# EAGLE board multiple_print_asomator_smd (EAGLE 7.7.0)
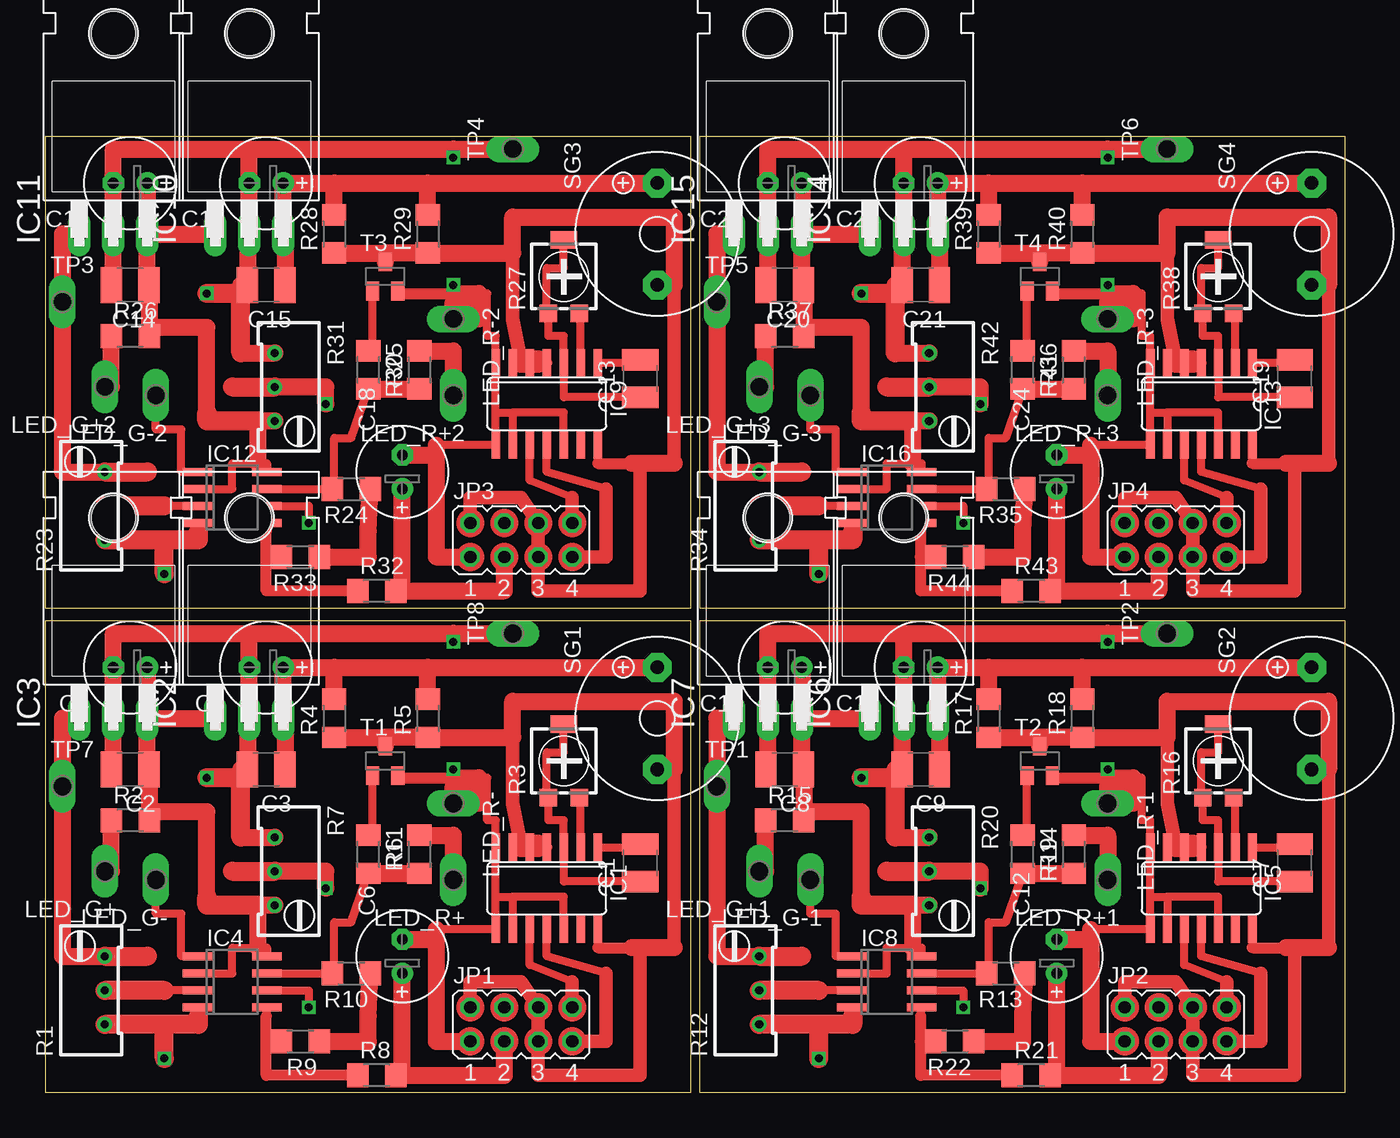
[diagram p0: board, top side]
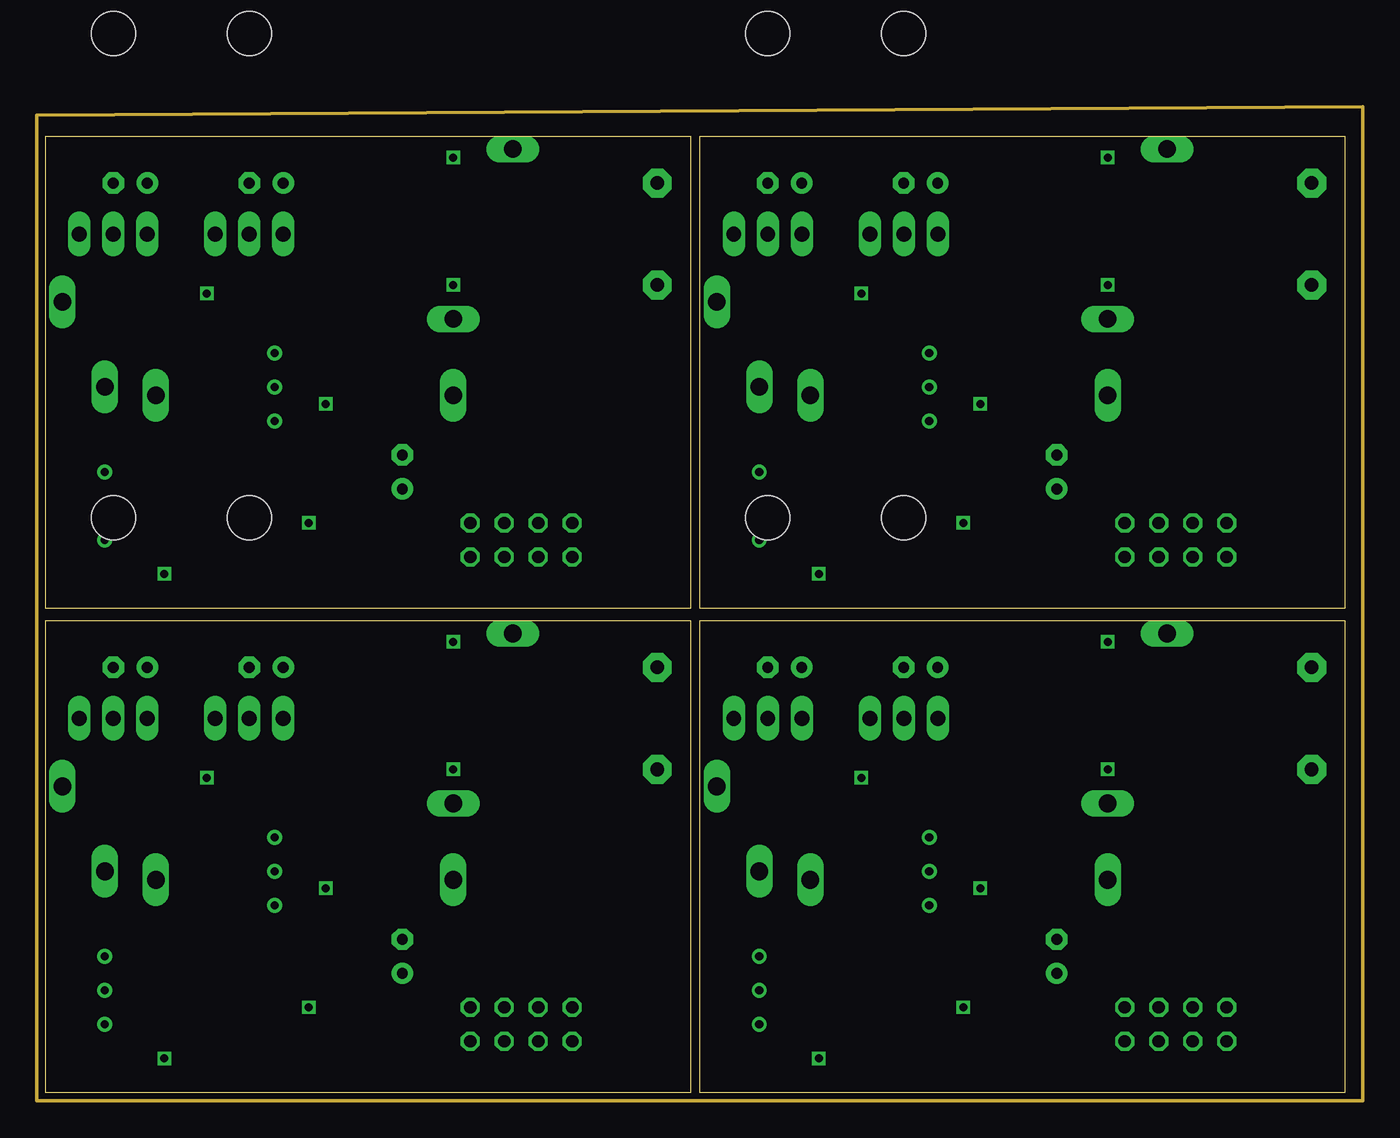
[diagram p1: board, inner layer Route2]
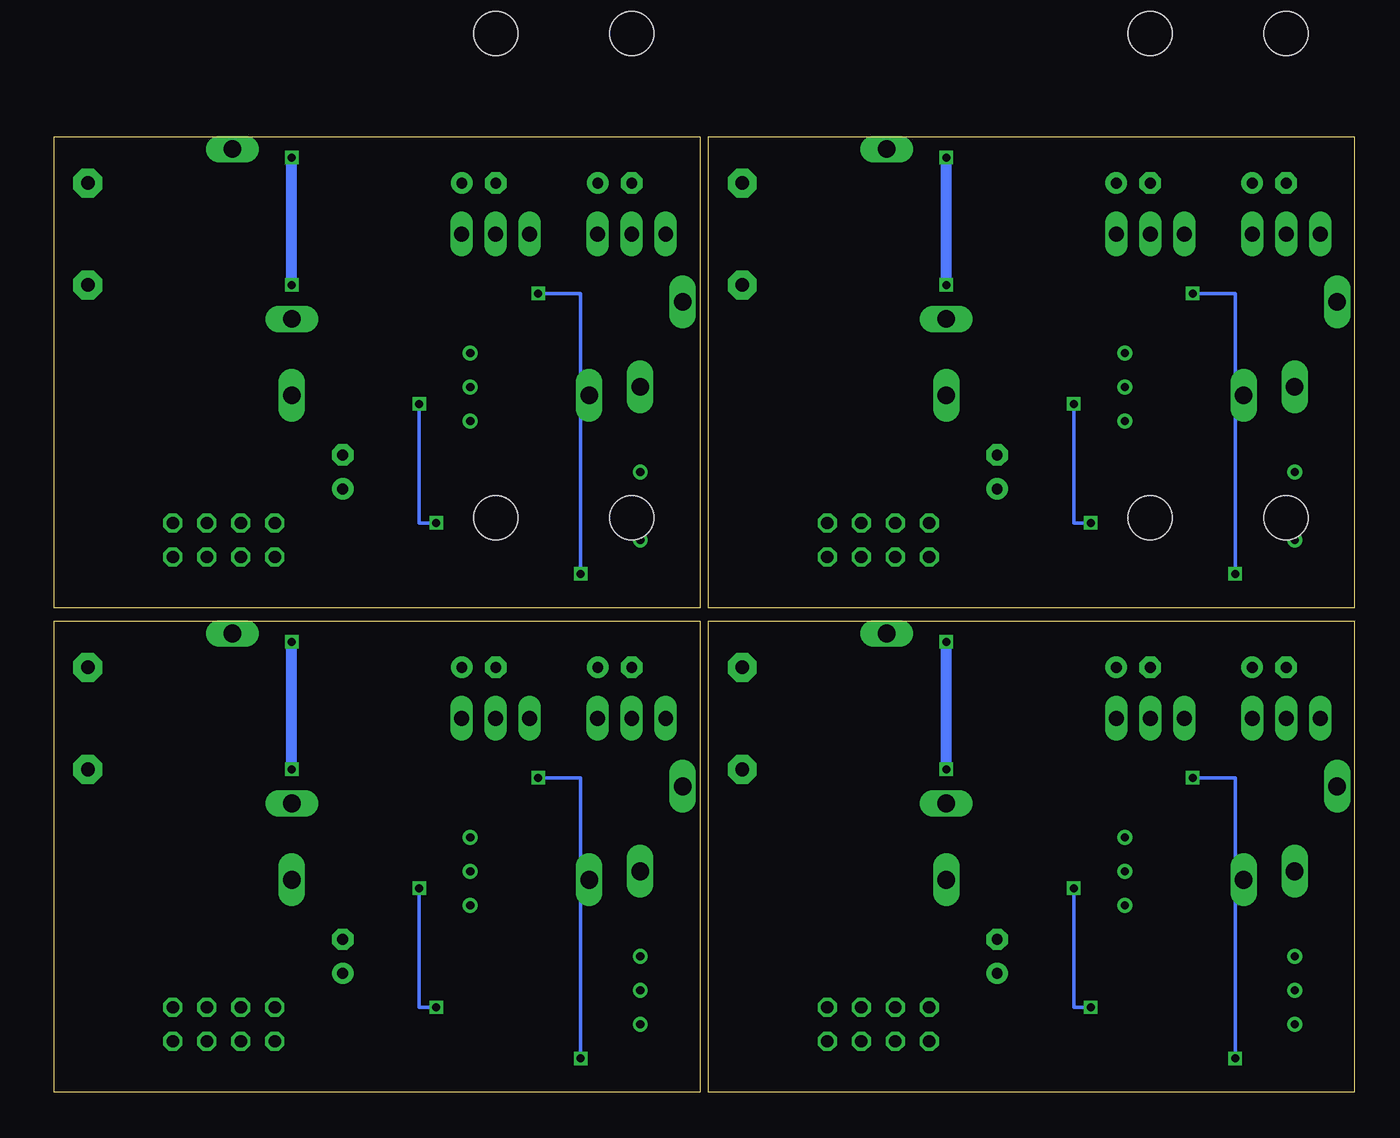
[diagram p2: board, bottom side, seen from below]

Size 97.13 x 71.42 mm. Coordinates in mm from the lower left corner, seen from the top.
Outline: 0,0 48.24,0 48.24,35.23 0,35.23 0,0
Outline: 48.9,0 97.13,0 97.13,35.23 48.9,35.23 48.9,0
Outline: 0,36.2 48.24,36.2 48.24,71.42 0,71.42 0,36.2
Outline: 48.9,36.2 97.13,36.2 97.13,71.42 48.9,71.42 48.9,36.2
Copper layers (1*2*16): Top 0.035mm / dielectric 1.5mm / Route2 0.035mm / dielectric 0.15mm / Bottom 0.035mm
Design rules "default *": minimum track width 10mil, minimum drill 24mil, track to track 8mil, track to pad 8mil, pad to pad 8mil, via to via 8mil, smd to smd 8mil, copper to edge 40mil, drill to drill 8mil, minimum pad ring 10mil, minimum via ring 8mil, stop-mask expansion 4mil, vias tented up to drill 0mil, thermal gap 10mil

## Footprints (pad centres in the part's own frame; a part is rotated, then mirrored left to right if it is on the bottom)
C1210 = smd 1.6 x 2.7: 1 -1.4,0; 2 1.4,0
E2,5-7 = drill 0.813 pad 1.6: + -1.27,0 | drill 0.813 pad 1.6 octagon: - 1.27,0
SO14 = smd 0.66 x 2.032: 1 -3.81,-3.073; 2 -2.54,-3.073; 3 -1.27,-3.073; 4 0,-3.073; 5 1.27,-3.073; 6 2.54,-3.073; 7 3.81,-3.073; 8 3.81,3.073; 9 2.54,3.073; 10 1.27,3.073; 11 0,3.073; 12 -1.27,3.073; 13 -2.54,3.073; 14 -3.81,3.073
TO220H = drill 1.118 long: 1 -2.54,-10.16; 2 0,-10.16; 3 2.54,-10.16 | hole 3.302: 0,4.826
SO08 = smd 0.6 x 2.2: 1 -1.905,-2.6; 2 -0.635,-2.6; 3 0.635,-2.6; 4 1.905,-2.6; 5 1.905,2.6; 6 0.635,2.6; 7 -0.635,2.6; 8 -1.905,2.6
JP4Q = drill 0.914 octagon: 1 -3.81,-1.27; 2 -3.81,1.27; 3 -1.27,-1.27; 4 -1.27,1.27; 5 1.27,-1.27; 6 1.27,1.27; 7 3.81,-1.27; 8 3.81,1.27
P1-13Y = drill 1.321 pad 1.905 long: TP 0,0
RTRIM64W = drill 0.61: 1 1.27,-2.54; 2 1.27,0; 3 1.27,2.54
R1206 = smd 1.6 x 1.803: 1 -1.422,0; 2 1.422,0
RTRIM4G/J = smd 1.3 x 1.3: 1 -1.15,-2.75; 3 1.15,-2.75 | smd 2 x 1.3: 2 0,2.75
F/TMB = drill 1.016 pad 2.159 octagon: + 3.81,0; - -3.81,0
SOT23 = smd 1 x 1.4: 1 -0.95,-1.1; 2 0.95,-1.1; 3 0,1.1

## Placement (x,y rotation side)
C1  [C1210]  44.45,17.14 90 top
C2  [C1210]  6.35,24.13 180 top
C3  [C1210]  16.51,24.13 180 top
C4  [E2,5-7]  6.35,31.75 180 top
C5  [E2,5-7]  16.51,31.75 180 top
C6  [E2,5-7]  26.67,10.16 90 top
C7  [C1210]  93.34,17.14 90 top
C8  [C1210]  55.25,24.13 180 top
C9  [C1210]  65.41,24.13 180 top
C10  [E2,5-7]  55.25,31.75 180 top
C11  [E2,5-7]  65.41,31.75 180 top
C12  [E2,5-7]  75.56,10.16 90 top
C13  [C1210]  44.45,53.34 90 top
C14  [C1210]  6.35,60.33 180 top
C15  [C1210]  16.51,60.33 180 top
C16  [E2,5-7]  6.35,67.94 180 top
C17  [E2,5-7]  16.51,67.94 180 top
C18  [E2,5-7]  26.67,46.36 90 top
C19  [C1210]  93.34,53.34 90 top
C20  [C1210]  55.25,60.33 180 top
C21  [C1210]  65.41,60.33 180 top
C22  [E2,5-7]  55.25,67.94 180 top
C23  [E2,5-7]  65.41,67.94 180 top
C24  [E2,5-7]  75.56,46.36 90 top
IC1  4047D  [SO14]  37.47,15.24 180 top
IC2  78T  [TO220H]  15.24,38.1 0 top
IC3  78T  [TO220H]  5.08,38.1 0 top
IC4  LM358D  [SO08]  13.97,8.26 270 top
IC5  4047D  [SO14]  86.36,15.24 180 top
IC6  78T  [TO220H]  64.13,38.1 0 top
IC7  78T  [TO220H]  53.98,38.1 0 top
IC8  LM358D  [SO08]  62.87,8.26 270 top
IC9  4047D  [SO14]  37.47,51.44 180 top
IC10  78T  [TO220H]  15.24,74.3 0 top
IC11  78T  [TO220H]  5.08,74.3 0 top
IC12  LM358D  [SO08]  13.97,44.45 270 top
IC13  4047D  [SO14]  86.36,51.44 180 top
IC14  78T  [TO220H]  64.13,74.3 0 top
IC15  78T  [TO220H]  53.98,74.3 0 top
IC16  LM358D  [SO08]  62.87,44.45 270 top
JP1  [JP4Q]  35.56,5.08 0 top
JP2  [JP4Q]  84.45,5.08 0 top
JP3  [JP4Q]  35.56,41.27 0 top
JP4  [JP4Q]  84.45,41.27 0 top
LED_G+  PTR1PAD1-13Y  [P1-13Y]  4.45,16.51 180 top
LED_G+1  PTR1PAD1-13Y  [P1-13Y]  53.34,16.51 180 top
LED_G+2  PTR1PAD1-13Y  [P1-13Y]  4.45,52.71 180 top
LED_G+3  PTR1PAD1-13Y  [P1-13Y]  53.34,52.71 180 top
LED_G-  PTR1PAD1-13Y  [P1-13Y]  8.26,15.88 180 top
LED_G-1  PTR1PAD1-13Y  [P1-13Y]  57.15,15.88 180 top
LED_G-2  PTR1PAD1-13Y  [P1-13Y]  8.26,52.07 180 top
LED_G-3  PTR1PAD1-13Y  [P1-13Y]  57.15,52.07 180 top
LED_R+  PTR1PAD1-13Y  [P1-13Y]  30.48,15.88 180 top
LED_R+1  PTR1PAD1-13Y  [P1-13Y]  79.38,15.88 180 top
LED_R+2  PTR1PAD1-13Y  [P1-13Y]  30.48,52.07 180 top
LED_R+3  PTR1PAD1-13Y  [P1-13Y]  79.38,52.07 180 top
LED_R-  PTR1PAD1-13Y  [P1-13Y]  30.48,21.59 270 top
LED_R-1  PTR1PAD1-13Y  [P1-13Y]  79.38,21.59 270 top
LED_R-2  PTR1PAD1-13Y  [P1-13Y]  30.48,57.79 270 top
LED_R-3  PTR1PAD1-13Y  [P1-13Y]  79.38,57.79 270 top
R1  50k  [RTRIM64W]  3.17,7.62 0 top
R2  1k  [R1206]  6.35,20.32 0 top
R3  [RTRIM4G/J]  38.73,24.76 0 top
R4  1k  [R1206]  21.59,27.94 90 top
R5  1k  [R1206]  28.57,27.94 90 top
R6  10k  [R1206]  24.13,17.78 270 top
R7  50k  [RTRIM64W]  18.41,16.51 180 top
R8  20k  [R1206]  24.76,1.27 0 top
R9  10k  [R1206]  19.05,3.81 180 top
R10  10k  [R1206]  22.86,8.89 180 top
R11  1k  [R1206]  27.94,17.78 90 top
R12  50k  [RTRIM64W]  52.07,7.62 0 top
R13  10k  [R1206]  71.75,8.89 180 top
R14  1k  [R1206]  76.83,17.78 90 top
R15  1k  [R1206]  55.25,20.32 0 top
R16  [RTRIM4G/J]  87.63,24.76 0 top
R17  1k  [R1206]  70.48,27.94 90 top
R18  1k  [R1206]  77.47,27.94 90 top
R19  10k  [R1206]  73.02,17.78 270 top
R20  50k  [RTRIM64W]  67.31,16.51 180 top
R21  20k  [R1206]  73.66,1.27 0 top
R22  10k  [R1206]  67.94,3.81 180 top
R23  50k  [RTRIM64W]  3.17,43.82 0 top
R24  10k  [R1206]  22.86,45.09 180 top
R25  1k  [R1206]  27.94,53.98 90 top
R26  1k  [R1206]  6.35,56.52 0 top
R27  [RTRIM4G/J]  38.73,60.96 0 top
R28  1k  [R1206]  21.59,64.13 90 top
R29  1k  [R1206]  28.57,64.13 90 top
R30  10k  [R1206]  24.13,53.98 270 top
R31  50k  [RTRIM64W]  18.41,52.71 180 top
R32  20k  [R1206]  24.76,37.47 0 top
R33  10k  [R1206]  19.05,40.01 180 top
R34  50k  [RTRIM64W]  52.07,43.82 0 top
R35  10k  [R1206]  71.75,45.09 180 top
R36  1k  [R1206]  76.83,53.98 90 top
R37  1k  [R1206]  55.25,56.52 0 top
R38  [RTRIM4G/J]  87.63,60.96 0 top
R39  1k  [R1206]  70.48,64.13 90 top
R40  1k  [R1206]  77.47,64.13 90 top
R41  10k  [R1206]  73.02,53.98 270 top
R42  50k  [RTRIM64W]  67.31,52.71 180 top
R43  20k  [R1206]  73.66,37.47 0 top
R44  10k  [R1206]  67.94,40.01 180 top
SG1  F/TMB  [F/TMB]  45.72,27.94 90 top
SG2  F/TMB  [F/TMB]  94.61,27.94 90 top
SG3  F/TMB  [F/TMB]  45.72,64.13 90 top
SG4  F/TMB  [F/TMB]  94.61,64.13 90 top
T1  BC847  [SOT23]  25.4,24.76 0 top
T2  BC847  [SOT23]  74.3,24.76 0 top
T3  BC847  [SOT23]  25.4,60.96 0 top
T4  BC847  [SOT23]  74.3,60.96 0 top
TP1  PTR1PAD1-13Y  [P1-13Y]  50.16,22.86 0 top
TP2  PTR1PAD1-13Y  [P1-13Y]  83.82,34.29 90 top
TP3  PTR1PAD1-13Y  [P1-13Y]  1.27,59.05 0 top
TP4  PTR1PAD1-13Y  [P1-13Y]  34.93,70.48 90 top
TP5  PTR1PAD1-13Y  [P1-13Y]  50.16,59.05 0 top
TP6  PTR1PAD1-13Y  [P1-13Y]  83.82,70.48 90 top
TP7  PTR1PAD1-13Y  [P1-13Y]  1.27,22.86 0 top
TP8  PTR1PAD1-13Y  [P1-13Y]  34.93,34.29 90 top

## Library data of the parts
C1-C24 R1-R44 = rcl
IC1 IC5 IC9 IC13 = 40xx
IC2-IC4 IC6-IC8 IC10-IC12 IC14-IC16 = linear
JP1-JP4 = jumper
LED_G+ LED_G+1-LED_G+3 LED_G- LED_G-1-LED_G-3 LED_R+ LED_R+1-LED_R+3 LED_R- LED_R-1-LED_R-3 TP1-TP8 = testpad
SG1-SG4 = buzzer; OC_FARNELL: unknown; OC_NEWARK: unknown
T1-T4 = transistor

## Nets
+5V: IC1.4 IC1.5 IC1.6 IC1.14 JP1.2 JP1.5 JP1.6 R4.1 R5.1 SG1.- T1.3
+5V1: IC5.4 IC5.5 IC5.6 IC5.14 JP2.2 JP2.5 JP2.6 R17.1 R18.1 SG2.- T2.3
+5V2: IC9.4 IC9.5 IC9.6 IC9.14 JP3.2 JP3.5 JP3.6 R28.1 R29.1 SG3.- T3.3
+5V3: IC13.4 IC13.5 IC13.6 IC13.14 JP4.2 JP4.5 JP4.6 R39.1 R40.1 SG4.- T4.3
+12V: C2.1 C4.+ IC2.1 IC3.3 IC4.2 IC4.8 R2.2 R7.3
+12V1: C8.1 C10.+ IC6.1 IC7.3 IC8.2 IC8.8 R15.2 R20.3
+12V2: C14.1 C16.+ IC10.1 IC11.3 IC12.2 IC12.8 R26.2 R31.3
+12V3: C20.1 C22.+ IC14.1 IC15.3 IC16.2 IC16.8 R37.2 R42.3
+18V: IC3.1 R1.3 TP7.TP
+18V1: IC7.1 R12.3 TP1.TP
+18V2: IC11.1 R23.3 TP3.TP
+18V3: IC15.1 R34.3 TP5.TP
GND: C2.2 C3.2 C4.- C5.- C6.- IC1.7 IC1.8 IC1.9 IC1.12 IC2.2 IC3.2 IC4.4 JP1.1 LED_R-.TP R1.1 R7.1 T1.2 TP8.TP
GND1: C8.2 C9.2 C10.- C11.- C12.- IC5.7 IC5.8 IC5.9 IC5.12 IC6.2 IC7.2 IC8.4 JP2.1 LED_R-1.TP R12.1 R20.1 T2.2 TP2.TP
GND2: C14.2 C15.2 C16.- C17.- C18.- IC9.7 IC9.8 IC9.9 IC9.12 IC10.2 IC11.2 IC12.4 JP3.1 LED_R-2.TP R23.1 R31.1 T3.2 TP4.TP
GND3: C20.2 C21.2 C22.- C23.- C24.- IC13.7 IC13.8 IC13.9 IC13.12 IC14.2 IC15.2 IC16.4 JP4.1 LED_R-3.TP R34.1 R42.1 T4.2 TP6.TP
N$2: LED_G+.TP R2.1
N$3: LED_R+.TP R11.2
N$4: IC4.1 LED_G-.TP
N$5: IC4.3 R1.2
N$6: IC4.7 R6.2 R10.2 R11.1
N$7: IC1.2 R3.3
N$8: C1.2 IC1.1
N$9: C1.1 IC1.3 R3.1 R3.2
N$10: C3.1 C5.+ IC2.3 R4.2 R5.2 SG1.+
N$12: IC1.10 JP1.8
N$13: IC4.5 R8.1 R9.2
N$14: R9.1 R10.1
N$15: IC4.6 R7.2
N$16: IC1.11 JP1.7
N$17: C6.+ JP1.3 R8.2
N$18: R6.1 T1.1
N$19: IC5.2 R16.3
N$20: C7.2 IC5.1
N$21: C7.1 IC5.3 R16.1 R16.2
N$22: IC8.1 LED_G-1.TP
N$23: IC8.3 R12.2
N$24: C9.1 C11.+ IC6.3 R17.2 R18.2 SG2.+
N$25: IC8.6 R20.2
N$26: IC8.5 R21.1 R22.2
N$27: R13.1 R22.1
N$28: R19.1 T2.1
N$29: IC8.7 R13.2 R14.1 R19.2
N$30: IC5.10 JP2.8
N$31: IC5.11 JP2.7
N$32: C12.+ JP2.3 R21.2
N$33: LED_G+1.TP R15.1
N$34: LED_R+1.TP R14.2
N$37: IC9.2 R27.3
N$38: C13.2 IC9.1
N$39: C13.1 IC9.3 R27.1 R27.2
N$40: IC12.1 LED_G-2.TP
N$41: IC12.3 R23.2
N$42: C15.1 C17.+ IC10.3 R28.2 R29.2 SG3.+
N$43: IC12.6 R31.2
N$44: IC12.5 R32.1 R33.2
N$45: R24.1 R33.1
N$46: R30.1 T3.1
N$47: IC12.7 R24.2 R25.1 R30.2
N$48: IC9.10 JP3.8
N$49: IC9.11 JP3.7
N$50: C18.+ JP3.3 R32.2
N$51: LED_G+2.TP R26.1
N$52: LED_R+2.TP R25.2
N$55: IC13.2 R38.3
N$56: C19.2 IC13.1
N$57: C19.1 IC13.3 R38.1 R38.2
N$58: IC16.1 LED_G-3.TP
N$59: IC16.3 R34.2
N$60: C21.1 C23.+ IC14.3 R39.2 R40.2 SG4.+
N$61: IC16.6 R42.2
N$62: IC16.5 R43.1 R44.2
N$63: R35.1 R44.1
N$64: R41.1 T4.1
N$65: IC16.7 R35.2 R36.1 R41.2
N$66: IC13.10 JP4.8
N$67: IC13.11 JP4.7
N$68: C24.+ JP4.3 R43.2
N$69: LED_G+3.TP R37.1
N$70: LED_R+3.TP R36.2

## Tracks (layer width: path | path; a pad name or v marks a point on that pad's centre or on a via)
+5V
  Top 0.406: IC1.6 IC1.5 36.83,18.31
  Top 0.61: IC1.14 41.27,10.79
  Top 0.813: 41.27,10.79 43.82,10.79 44.45,10.79 | IC1.4 36.83,18.31 36.83,18.41
  Top 1.016: 44.45,10.79 44.45,1.27 36.83,1.27 JP1.5 JP1.6 35.56,8.26 31.75,8.26 JP1.2 | 46.99,24.13 46.99,10.79 | 35.56,18.41 34.93,21.59 34.93,29.21
  Top 1.27: SG1.- 46.99,24.13 46.99,29.21 34.93,29.21 34.93,26.52 R5.1 25.4,26.52 | 46.99,10.79 43.82,10.79 | R4.1 25.4,26.52 | 25.4,26.52 T1.3
  Top 1.676: 36.83,18.41 35.56,18.41
+5V1
  Top 0.406: IC5.6 IC5.5 85.72,18.31
  Top 0.61: IC5.14 90.17,10.79
  Top 0.813: 90.17,10.79 92.71,10.79 93.34,10.79 | IC5.4 85.72,18.31 85.72,18.41
  Top 1.016: 93.34,10.79 93.34,1.27 85.72,1.27 JP2.5 JP2.6 84.45,8.26 80.64,8.26 JP2.2 | 95.88,24.13 95.88,10.79 | 84.45,18.41 83.82,21.59 83.82,29.21
  Top 1.27: SG2.- 95.88,24.13 95.88,29.21 83.82,29.21 83.82,26.52 R18.1 74.3,26.52 | 95.88,10.79 92.71,10.79 | R17.1 74.3,26.52 | 74.3,26.52 T2.3
  Top 1.676: 85.72,18.41 84.45,18.41
+5V2
  Top 0.406: IC9.6 IC9.5 36.83,54.51
  Top 0.61: IC9.14 41.27,46.99
  Top 0.813: 41.27,46.99 43.82,46.99 44.45,46.99 | IC9.4 36.83,54.51 36.83,54.61
  Top 1.016: 44.45,46.99 44.45,37.47 36.83,37.47 JP3.5 JP3.6 35.56,44.45 31.75,44.45 JP3.2 | 46.99,60.33 46.99,46.99 | 35.56,54.61 34.93,57.79 34.93,65.41
  Top 1.27: SG3.- 46.99,60.33 46.99,65.41 34.93,65.41 34.93,62.71 R29.1 25.4,62.71 | 46.99,46.99 43.82,46.99 | R28.1 25.4,62.71 | 25.4,62.71 T3.3
  Top 1.676: 36.83,54.61 35.56,54.61
+5V3
  Top 0.406: IC13.6 IC13.5 85.72,54.51
  Top 0.61: IC13.14 90.17,46.99
  Top 0.813: 90.17,46.99 92.71,46.99 93.34,46.99 | IC13.4 85.72,54.51 85.72,54.61
  Top 1.016: 93.34,46.99 93.34,37.47 85.72,37.47 JP4.5 JP4.6 84.45,44.45 80.64,44.45 JP4.2 | 95.88,60.33 95.88,46.99 | 84.45,54.61 83.82,57.79 83.82,65.41
  Top 1.27: SG4.- 95.88,60.33 95.88,65.41 83.82,65.41 83.82,62.71 R40.1 74.3,62.71 | 95.88,46.99 92.71,46.99 | R39.1 74.3,62.71 | 74.3,62.71 T4.3
  Top 1.676: 85.72,54.61 84.45,54.61
+12V
  Top 0.61: IC4.8 16.57,10.79 15.88,10.79 13.97,10.79 13.97,8.89 IC4.2
  Top 1.27: C4.+ IC3.3 | IC3.3 7.62,24.13 C2.1 7.77,24.13 7.77,20.95 | IC3.3 IC2.1 | R7.3 15.88,13.97 15.88,10.79 | 7.77,20.95 R2.2 | 12.06,14.61 12.06,20.95 7.77,20.95
  Top 1.422: 15.88,13.97 12.06,13.97 12.06,14.61
+12V1
  Top 0.61: IC8.8 65.46,10.79 64.77,10.79 62.87,10.79 62.87,8.89 IC8.2
  Top 1.27: C10.+ IC7.3 | IC7.3 56.52,24.13 C8.1 56.67,24.13 56.67,20.95 | IC7.3 IC6.1 | R20.3 64.77,13.97 64.77,10.79 | 56.67,20.95 R15.2 | 60.96,14.61 60.96,20.95 56.67,20.95
  Top 1.422: 64.77,13.97 60.96,13.97 60.96,14.61
+12V2
  Top 0.61: IC12.8 16.57,46.99 15.88,46.99 13.97,46.99 13.97,45.09 IC12.2
  Top 1.27: C16.+ IC11.3 | IC11.3 7.62,60.33 C14.1 7.77,60.33 7.77,57.15 | IC11.3 IC10.1 | R31.3 15.88,50.16 15.88,46.99 | 7.77,57.15 R26.2 | 12.06,50.8 12.06,57.15 7.77,57.15
  Top 1.422: 15.88,50.16 12.06,50.16 12.06,50.8
+12V3
  Top 0.61: IC16.8 65.46,46.99 64.77,46.99 62.87,46.99 62.87,45.09 IC16.2
  Top 1.27: C22.+ IC15.3 | IC15.3 56.52,60.33 C20.1 56.67,60.33 56.67,57.15 | IC15.3 IC14.1 | R42.3 64.77,50.16 64.77,46.99 | 56.67,57.15 R37.2 | 60.96,50.8 60.96,57.15 56.67,57.15
  Top 1.422: 64.77,50.16 60.96,50.16 60.96,50.8
+18V
  Top 1.27: IC3.1 1.27,27.94 TP7.TP 1.27,10.16 R1.3
  Top 1.422: R1.3 7.62,10.16
+18V1
  Top 1.27: IC7.1 50.16,27.94 TP1.TP 50.16,10.16 R12.3
  Top 1.422: R12.3 56.52,10.16
+18V2
  Top 1.27: IC11.1 1.27,64.13 TP3.TP 1.27,46.36 R23.3
  Top 1.422: R23.3 7.62,46.36
+18V3
  Top 1.27: IC15.1 50.16,64.13 TP5.TP 50.16,46.36 R34.3
  Top 1.422: R34.3 56.52,46.36
GND  (via drill 0.6)
  Top 0.61: IC1.12 38.73,14.61 34.93,14.61 | 34.93,14.61 IC1.9 | 33.66,14.61 IC1.8 29.21,12.17 | 33.66,14.61 34.93,14.61 | 33.66,14.61 IC1.7 33.66,20.32 33.02,20.32 33.02,23.49 32.39,23.49 | IC4.4 11.43,6.35 11.43,5.71 | 26.35,23.49 T1.2
  Top 0.813: 26.35,23.49 30.48,23.49 v30.48,24.13 | v30.48,33.66 30.48,34.29
  Top 1.27: C2.2 5.08,24.13 IC3.2 C4.- 5.08,34.29 15.24,34.29 | 29.21,12.17 29.21,11.43 | 29.21,11.43 29.21,3.81 JP1.1 | 14.61,23.49 14.61,24.13 C3.2 15.11,27.94 IC2.2 C5.- 15.24,34.29 | 14.61,19.05 R7.1 | C6.- 29.21,11.43 | 15.24,34.29 30.48,34.29 TP8.TP | 30.48,22.86 LED_R-.TP 32.39,21.59 32.39,23.49 30.48,23.49
  Top 1.422: 11.43,5.71 11.43,5.08 8.89,5.08 | 8.89,5.08 R1.1 | 14.61,19.05 14.61,23.49 v12.06,23.49 | v8.89,2.54 8.89,5.08
  Bottom 0.254: v12.06,23.49 8.89,23.49 v8.89,2.54
  Bottom 0.813: v30.48,24.13 v30.48,33.66
GND1  (via drill 0.6)
  Top 0.61: IC5.12 87.63,14.61 83.82,14.61 | 83.82,14.61 IC5.9 | 82.55,14.61 IC5.8 78.1,12.17 | 82.55,14.61 83.82,14.61 | 82.55,14.61 IC5.7 82.55,20.32 81.91,20.32 81.91,23.49 81.28,23.49 | IC8.4 60.33,6.35 60.33,5.71 | 75.24,23.49 T2.2
  Top 0.813: 75.24,23.49 79.38,23.49 v79.38,24.13 | v79.38,33.66 79.38,34.29
  Top 1.27: C8.2 53.98,24.13 IC7.2 C10.- 53.98,34.29 64.13,34.29 | 78.1,12.17 78.1,11.43 | 78.1,11.43 78.1,3.81 JP2.1 | 63.5,23.49 63.5,24.13 C9.2 64,27.94 IC6.2 C11.- 64.13,34.29 | 63.5,19.05 R20.1 | C12.- 78.1,11.43 | 64.13,34.29 79.38,34.29 TP2.TP | 79.38,22.86 LED_R-1.TP 81.28,21.59 81.28,23.49 79.38,23.49
  Top 1.422: 60.33,5.71 60.33,5.08 57.79,5.08 | 57.79,5.08 R12.1 | 63.5,19.05 63.5,23.49 v60.96,23.49 | v57.79,2.54 57.79,5.08
  Bottom 0.254: v60.96,23.49 57.79,23.49 v57.79,2.54
  Bottom 0.813: v79.38,24.13 v79.38,33.66
GND2  (via drill 0.6)
  Top 0.61: IC9.12 38.73,50.8 34.93,50.8 | 34.93,50.8 IC9.9 | 33.66,50.8 IC9.8 29.21,48.36 | 33.66,50.8 34.93,50.8 | 33.66,50.8 IC9.7 33.66,56.52 33.02,56.52 33.02,59.69 32.39,59.69 | IC12.4 11.43,42.55 11.43,41.91 | 26.35,59.69 T3.2
  Top 0.813: 26.35,59.69 30.48,59.69 v30.48,60.33 | v30.48,69.85 30.48,70.48
  Top 1.27: C14.2 5.08,60.33 IC11.2 C16.- 5.08,70.48 15.24,70.48 | 29.21,48.36 29.21,47.62 | 29.21,47.62 29.21,40.01 JP3.1 | 14.61,59.69 14.61,60.33 C15.2 15.11,64.13 IC10.2 C17.- 15.24,70.48 | 14.61,55.25 R31.1 | C18.- 29.21,47.62 | 15.24,70.48 30.48,70.48 TP4.TP | 30.48,59.05 LED_R-2.TP 32.39,57.79 32.39,59.69 30.48,59.69
  Top 1.422: 11.43,41.91 11.43,41.27 8.89,41.27 | 8.89,41.27 R23.1 | 14.61,55.25 14.61,59.69 v12.06,59.69 | v8.89,38.73 8.89,41.27
  Bottom 0.254: v12.06,59.69 8.89,59.69 v8.89,38.73
  Bottom 0.813: v30.48,60.33 v30.48,69.85
GND3  (via drill 0.6)
  Top 0.61: IC13.12 87.63,50.8 83.82,50.8 | 83.82,50.8 IC13.9 | 82.55,50.8 IC13.8 78.1,48.36 | 82.55,50.8 83.82,50.8 | 82.55,50.8 IC13.7 82.55,56.52 81.91,56.52 81.91,59.69 81.28,59.69 | IC16.4 60.33,42.55 60.33,41.91 | 75.24,59.69 T4.2
  Top 0.813: 75.24,59.69 79.38,59.69 v79.38,60.33 | v79.38,69.85 79.38,70.48
  Top 1.27: C20.2 53.98,60.33 IC15.2 C22.- 53.98,70.48 64.13,70.48 | 78.1,48.36 78.1,47.62 | 78.1,47.62 78.1,40.01 JP4.1 | 63.5,59.69 63.5,60.33 C21.2 64,64.13 IC14.2 C23.- 64.13,70.48 | 63.5,55.25 R42.1 | C24.- 78.1,47.62 | 64.13,70.48 79.38,70.48 TP6.TP | 79.38,59.05 LED_R-3.TP 81.28,57.79 81.28,59.69 79.38,59.69
  Top 1.422: 60.33,41.91 60.33,41.27 57.79,41.27 | 57.79,41.27 R34.1 | 63.5,55.25 63.5,59.69 v60.96,59.69 | v57.79,38.73 57.79,41.27
  Bottom 0.254: v60.96,59.69 57.79,59.69 v57.79,38.73
  Bottom 0.813: v79.38,60.33 v79.38,69.85
N$1
  Top 1.27: 31.11,22.86 31.75,22.86 31.75,22.22 31.11,22.22
N$2
  Top 1.27: LED_G+.TP 4.93,16.51 R2.1
N$3
  Top 1.27: R11.2 30.48,19.2 LED_R+.TP
N$4
  Top 0.61: IC4.1 10.16,10.16 10.16,13.34 8.26,13.34 LED_G-.TP
N$5
  Top 0.61: IC4.3 8.89,7.62
  Top 1.422: 8.89,7.62 R1.2
N$6
  Top 0.61: IC4.7 R10.2 21.59,9.53 21.59,12.7 22.86,12.7 R6.2
  Top 1.27: R6.2 R11.1
N$7
  Top 0.61: IC1.2 40.01,21.59 39.89,21.59 R3.3
N$8
  Top 0.61: IC1.1 44.45,18.31 C1.2
N$9
  Top 0.61: C1.1 38.73,15.74 IC1.3 38.73,20.32 37.59,20.32 R3.1 37.47,22.01 37.47,25.4 38.73,25.4 R3.2
N$10
  Top 1.27: C3.1 17.91,27.94 IC2.3 C5.+ 21.59,31.75 | 21.59,31.75 28.57,31.75 | 28.57,31.75 SG1.+ | R5.2 28.57,31.75 | R4.2 21.59,31.75
N$12
  Top 0.61: 39.37,8.26 36.2,9.53 IC1.10
  Top 1.016: JP1.8 39.37,8.26
N$13
  Top 0.61: R9.2 16.36,3.81 IC4.5 16.51,5.71
  Top 0.813: R8.1 16.51,1.27 16.51,5.71
N$14
  Top 1.27: R9.1 24.13,3.81 24.13,5.71 R10.1
N$15  (via drill 0.6)
  Top 0.61: IC4.6 19.68,7.62 v19.68,6.35
  Top 1.27: v20.95,15.24 20.95,16.51 R7.2
  Top 1.422: 13.97,16.51 R7.2
  Bottom 0.254: v19.68,6.35 20.95,6.35 v20.95,15.24
N$16
  Top 0.61: 41.91,8.89 37.47,10.16 IC1.11
  Top 1.016: JP1.7 41.91,3.81 41.91,8.89
N$17
  Top 1.27: JP1.3 34.29,1.27 R8.2 26.67,1.27 C6.+
N$18
  Top 0.61: R6.1 24.45,19.2 T1.1
N$19
  Top 0.61: IC5.2 88.9,21.59 88.78,21.59 R16.3
N$20
  Top 0.61: IC5.1 93.34,18.31 C7.2
N$21
  Top 0.61: C7.1 87.63,15.74 IC5.3 87.63,20.32 86.48,20.32 R16.1 86.36,22.01 86.36,25.4 87.63,25.4 R16.2
N$22
  Top 0.61: IC8.1 59.05,10.16 59.05,13.34 57.15,13.34 LED_G-1.TP
N$23
  Top 0.61: IC8.3 57.79,7.62
  Top 1.422: 57.79,7.62 R12.2
N$24
  Top 1.27: C9.1 66.8,27.94 IC6.3 C11.+ 70.48,31.75 | 70.48,31.75 77.47,31.75 | 77.47,31.75 SG2.+ | R18.2 77.47,31.75 | R17.2 70.48,31.75
N$25  (via drill 0.6)
  Top 0.61: IC8.6 68.58,7.62 v68.58,6.35
  Top 1.27: v69.85,15.24 69.85,16.51 R20.2
  Top 1.422: 62.87,16.51 R20.2
  Bottom 0.254: v68.58,6.35 69.85,6.35 v69.85,15.24
N$26
  Top 0.61: R22.2 65.25,3.81 IC8.5 65.41,5.71
  Top 0.813: R21.1 65.41,1.27 65.41,5.71
N$27
  Top 1.27: R22.1 73.02,3.81 73.02,5.71 R13.1
N$28
  Top 0.61: R19.1 73.34,19.2 T2.1
N$29
  Top 0.61: IC8.7 R13.2 70.48,9.53 70.48,12.7 71.75,12.7 R19.2
  Top 1.27: R19.2 R14.1
N$30
  Top 0.61: 88.27,8.26 85.09,9.53 IC5.10
  Top 1.016: JP2.8 88.27,8.26
N$31
  Top 0.61: 90.8,8.89 86.36,10.16 IC5.11
  Top 1.016: JP2.7 90.8,3.81 90.8,8.89
N$32
  Top 1.27: JP2.3 83.18,1.27 R21.2 75.56,1.27 C12.+
N$33
  Top 1.27: LED_G+1.TP 53.82,16.51 R15.1
N$34
  Top 1.27: R14.2 79.38,19.2 LED_R+1.TP
N$35
  Top 1.27: 80.01,22.86 80.64,22.86 80.64,22.22 80.01,22.22
N$37
  Top 0.61: IC9.2 40.01,57.79 39.89,57.79 R27.3
N$38
  Top 0.61: IC9.1 44.45,54.51 C13.2
N$39
  Top 0.61: C13.1 38.73,51.94 IC9.3 38.73,56.52 37.59,56.52 R27.1 37.47,58.21 37.47,61.59 38.73,61.59 R27.2
N$40
  Top 0.61: IC12.1 10.16,46.36 10.16,49.53 8.26,49.53 LED_G-2.TP
N$41
  Top 0.61: IC12.3 8.89,43.82
  Top 1.422: 8.89,43.82 R23.2
N$42
  Top 1.27: C15.1 17.91,64.13 IC10.3 C17.+ 21.59,67.94 | 21.59,67.94 28.57,67.94 | 28.57,67.94 SG3.+ | R29.2 28.57,67.94 | R28.2 21.59,67.94
N$43  (via drill 0.6)
  Top 0.61: IC12.6 19.68,43.82 v19.68,42.55
  Top 1.27: v20.95,51.44 20.95,52.71 R31.2
  Top 1.422: 13.97,52.71 R31.2
  Bottom 0.254: v19.68,42.55 20.95,42.55 v20.95,51.44
N$44
  Top 0.61: R33.2 16.36,40.01 IC12.5 16.51,41.91
  Top 0.813: R32.1 16.51,37.47 16.51,41.91
N$45
  Top 1.27: R33.1 24.13,40.01 24.13,41.91 R24.1
N$46
  Top 0.61: R30.1 24.45,55.4 T3.1
N$47
  Top 0.61: IC12.7 R24.2 21.59,45.72 21.59,48.9 22.86,48.9 R30.2
  Top 1.27: R30.2 R25.1
N$48
  Top 0.61: 39.37,44.45 36.2,45.72 IC9.10
  Top 1.016: JP3.8 39.37,44.45
N$49
  Top 0.61: 41.91,45.09 37.47,46.36 IC9.11
  Top 1.016: JP3.7 41.91,40.01 41.91,45.09
N$50
  Top 1.27: JP3.3 34.29,37.47 R32.2 26.67,37.47 C18.+
N$51
  Top 1.27: LED_G+2.TP 4.93,52.71 R26.1
N$52
  Top 1.27: R25.2 30.48,55.4 LED_R+2.TP
N$53
  Top 1.27: 31.11,59.05 31.75,59.05 31.75,58.42 31.11,58.42
N$55
  Top 0.61: IC13.2 88.9,57.79 88.78,57.79 R38.3
N$56
  Top 0.61: IC13.1 93.34,54.51 C19.2
N$57
  Top 0.61: C19.1 87.63,51.94 IC13.3 87.63,56.52 86.48,56.52 R38.1 86.36,58.21 86.36,61.59 87.63,61.59 R38.2
N$58
  Top 0.61: IC16.1 59.05,46.36 59.05,49.53 57.15,49.53 LED_G-3.TP
N$59
  Top 0.61: IC16.3 57.79,43.82
  Top 1.422: 57.79,43.82 R34.2
N$60
  Top 1.27: C21.1 66.8,64.13 IC14.3 C23.+ 70.48,67.94 | 70.48,67.94 77.47,67.94 | 77.47,67.94 SG4.+ | R40.2 77.47,67.94 | R39.2 70.48,67.94
N$61  (via drill 0.6)
  Top 0.61: IC16.6 68.58,43.82 v68.58,42.55
  Top 1.27: v69.85,51.44 69.85,52.71 R42.2
  Top 1.422: 62.87,52.71 R42.2
  Bottom 0.254: v68.58,42.55 69.85,42.55 v69.85,51.44
N$62
  Top 0.61: R44.2 65.25,40.01 IC16.5 65.41,41.91
  Top 0.813: R43.1 65.41,37.47 65.41,41.91
N$63
  Top 1.27: R44.1 73.02,40.01 73.02,41.91 R35.1
N$64
  Top 0.61: R41.1 73.34,55.4 T4.1
N$65
  Top 0.61: IC16.7 R35.2 70.48,45.72 70.48,48.9 71.75,48.9 R41.2
  Top 1.27: R41.2 R36.1
N$66
  Top 0.61: 88.27,44.45 85.09,45.72 IC13.10
  Top 1.016: JP4.8 88.27,44.45
N$67
  Top 0.61: 90.8,45.09 86.36,46.36 IC13.11
  Top 1.016: JP4.7 90.8,40.01 90.8,45.09
N$68
  Top 1.27: JP4.3 83.18,37.47 R43.2 75.56,37.47 C24.+
N$69
  Top 1.27: LED_G+3.TP 53.82,52.71 R37.1
N$70
  Top 1.27: R36.2 79.38,55.4 LED_R+3.TP
N$71
  Top 1.27: 80.01,59.05 80.64,59.05 80.64,58.42 80.01,58.42
S$1
  Route2 0.254: -0.64,-0.64 -0.64,73.02 98.42,73.66 98.42,-0.64 -0.64,-0.64
(copper drawn outside any net)
  shapes: Top circle x32